# Altium PCB pcb_2023-05-29.pcbdoc
Units mm, origin at the board's own origin, x right, y up, seen from the top; angles counter-clockwise.
Board outline 86.78 x 96.39 mm, 2 copper layers (Top Layer, Bottom Layer); 4 components, 34 nets, 40 pads, 0 vias.
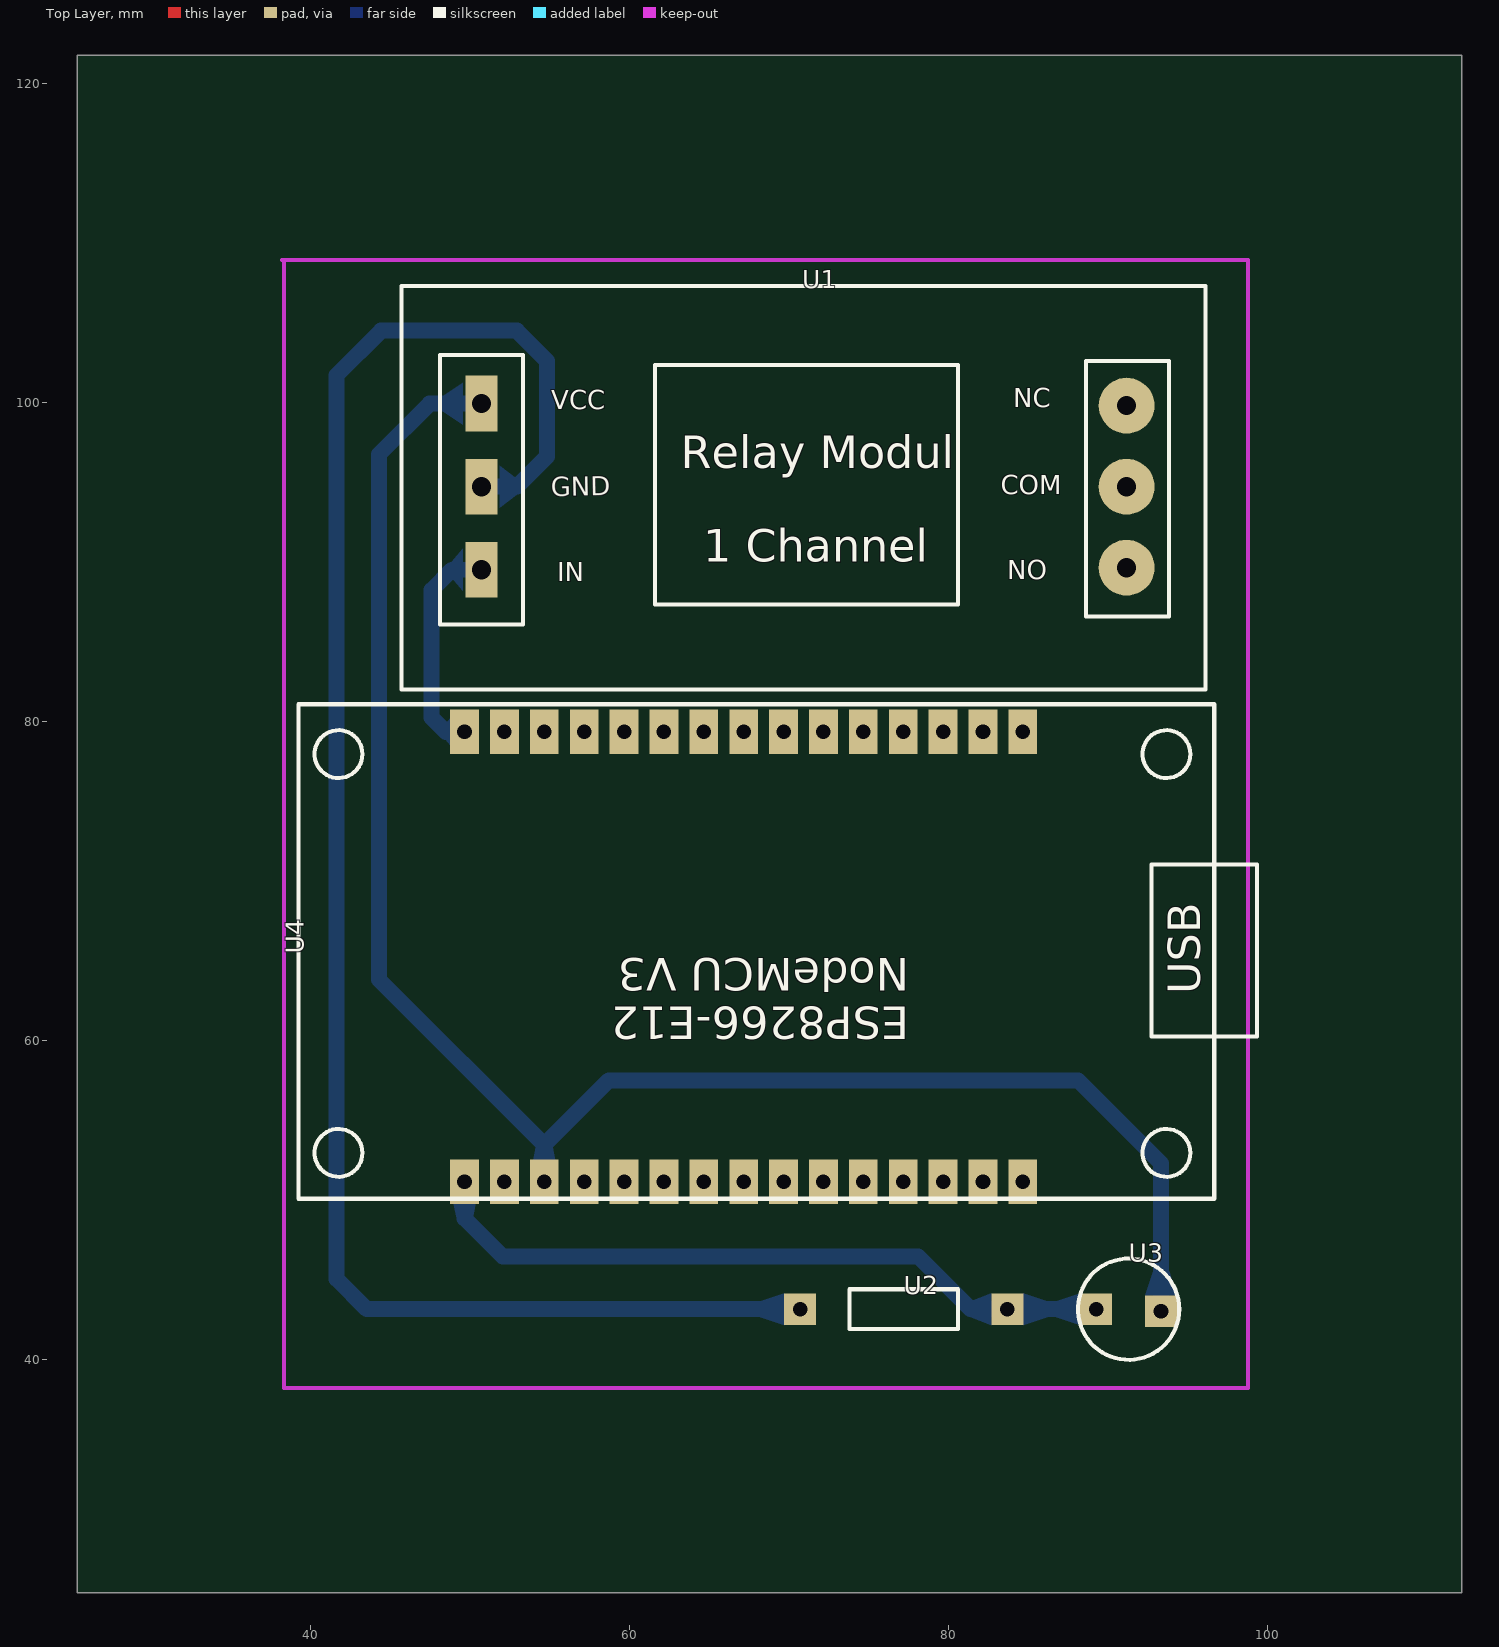
[diagram p0: Top Layer view]
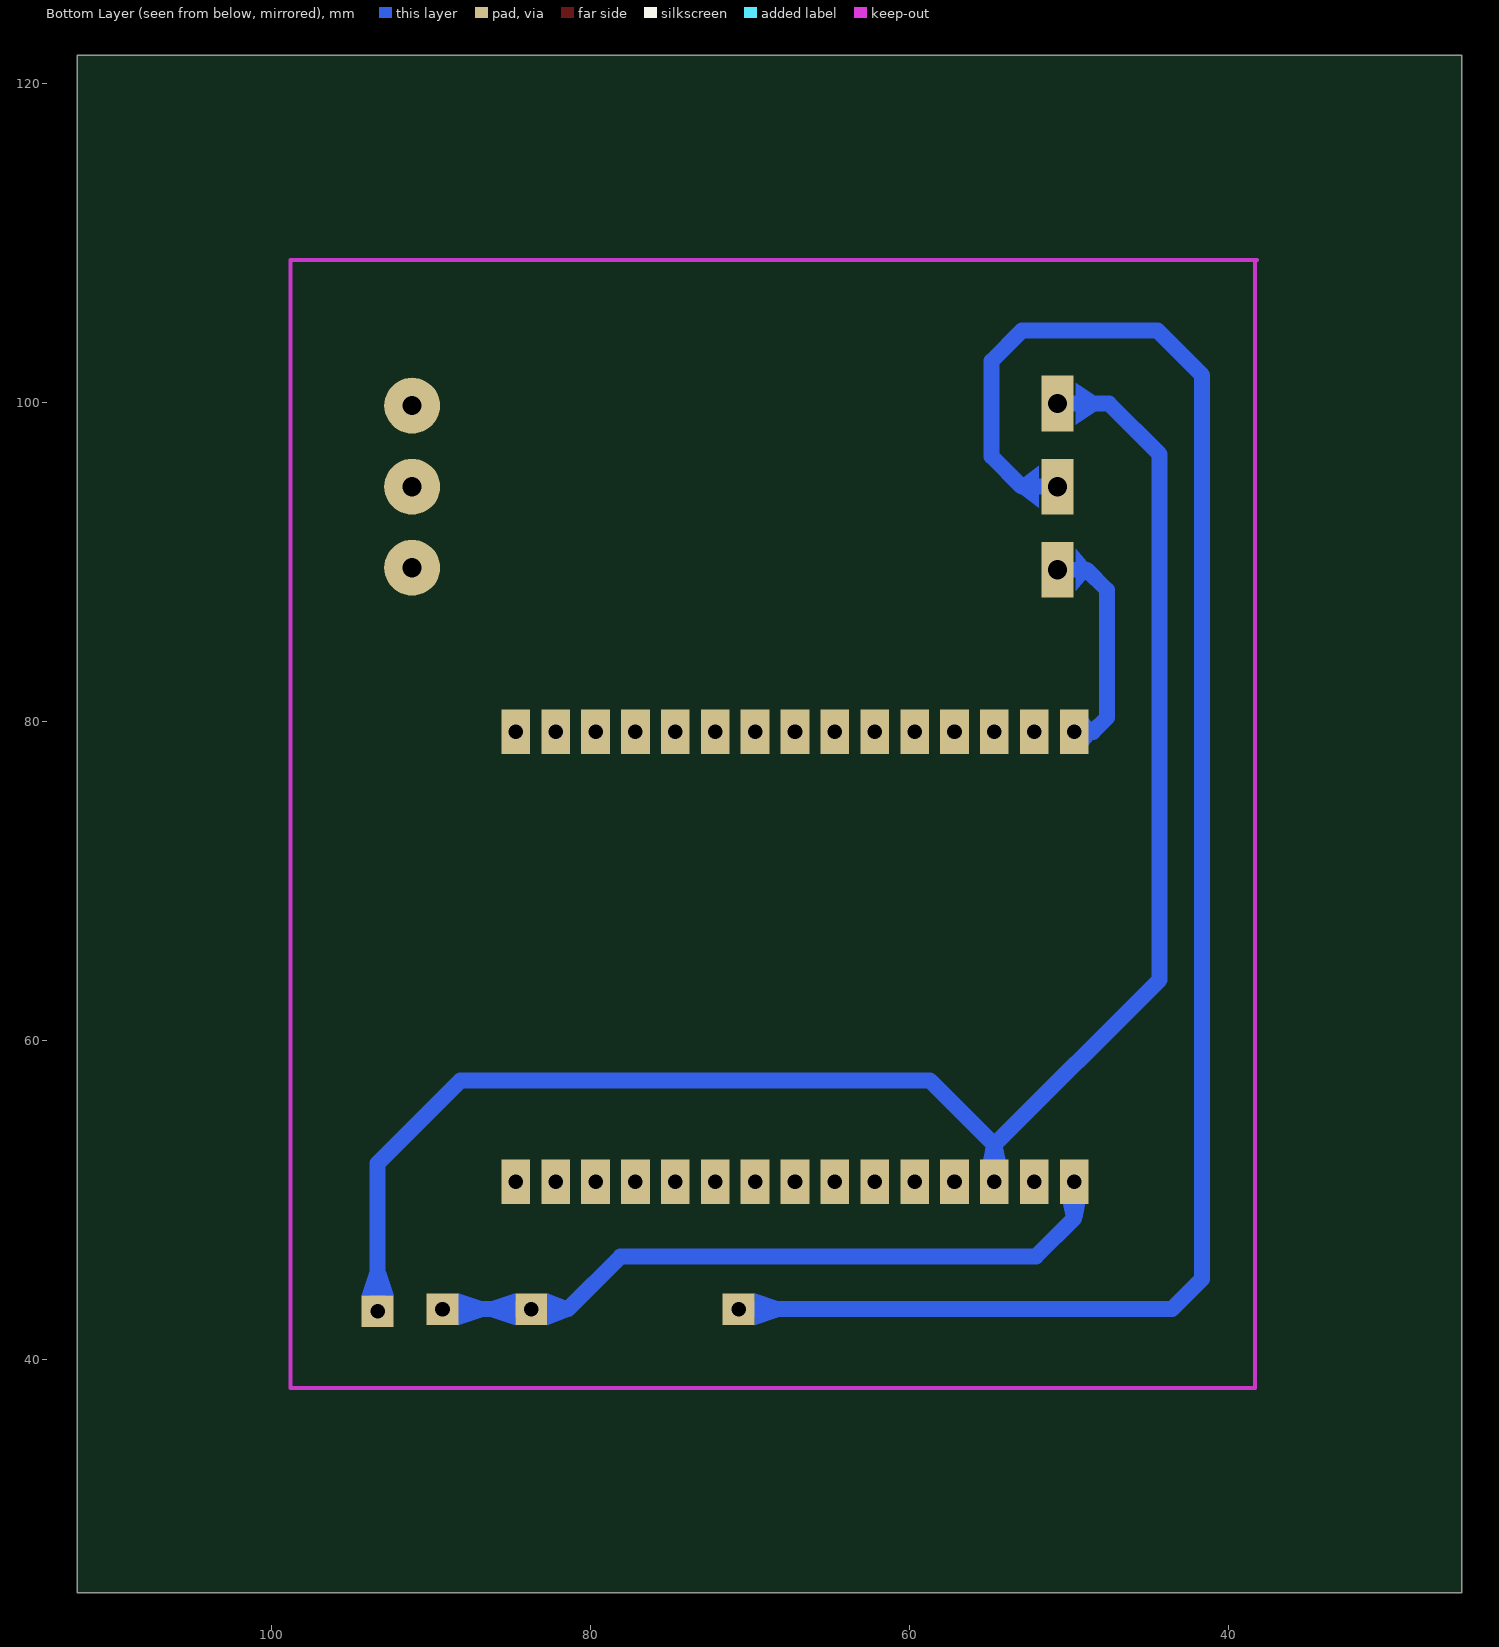
[diagram p1: Bottom Layer view, seen from below]

## Layer stack, top to bottom
Top Layer: signal copper (thickness not stored)
Dielectric: dielectric 0.32, FR-4, Dk 4.8
Bottom Layer: signal copper (thickness not stored)

## Board outline
112.181,25.4 25.4,25.4 25.4,121.793 112.181,121.793

## Components (designator, comment, footprint, x,y, rotation, side; value= is the part's Value field where it differs from the comment)
U1 "Relay Module 1 Channel" "RELAY MODULE HW-279 2 RELAYS" 70.866,94.869 r0 top
U2 "10KRESISTOR" 10KRESISTOR 77.216,43.18 r0 top
U3 "LDR" LDR 89.281,43.18 r0 top
U4 "ESP8266-E12 NODEMCU V3" ESP8266-E12-NODEMCU-V3 67.183,65.278 r90 top

## Footprints (in the part's own frame and the unit in brackets; to place one, negate y for a bottom-side part, rotate by r counter-clockwise, add the part's x,y. Pads: shape width x height; smd on the part's side, far side on the other; paste and mask are expansions set on the pad)
10KRESISTOR [mm]
  rect 2x2 hole 0.914: 1(6.5,0) 2(-6.5,0)
  silkscreen extent -3.4,-1.25 3.4,1.25
ESP8266-E12-NODEMCU-V3 [mm]
  rect 2.8x1.8 hole 0.914: 1(-14.1,17.5) 2(-14.1,15) 3(-14.1,12.5) 4(-14.1,10) 5(-14.1,7.5) 6(-14.1,5) 7(-14.1,2.5) 8(-14.1,0) 9(-14.1,-2.5) 10(-14.1,-5) 11(-14.1,-7.5) 12(-14.1,-10) 13(-14.1,-12.5) 14(-14.1,-15) 15(-14.1,-17.5) 16(14.1,17.5) 17(14.1,15) 18(14.1,12.5) 19(14.1,10) 20(14.1,7.5) 21(14.1,5) 22(14.1,2.5) 23(14.1,0) 24(14.1,-2.5) 25(14.1,-5) 26(14.1,-7.5) 27(14.1,-10) 28(14.1,-12.5) 29(14.1,-15) 30(14.1,-17.5)
  silkscreen extent -15.17,-32.17 15.83,27.9
LDR [mm]
  rect 2x2 hole 0.914: 1(0,0) 2(4.064,-0.127)
  silkscreen extent -1.14,-3.17 5.21,3.17
"RELAY MODULE HW-279 2 RELAYS" [mm]
  rect 2x3.5 hole 1.2: 1(-20.13,-5.334) 2(-20.13,-0.127) 3(-20.13,5.08)
  round 3.5 hole 1.2: 4(20.32,-5.207) 5(20.32,-0.127) 6(20.32,4.953)
  silkscreen extent -25.15,-12.83 25.27,12.45

## Nets (pads, with @x,y where several pads share a name; then routed paths per layer and width w, separated by ;. In a path a pad name is that pad's centre, name@x,y a point inside that pad or via, vN(x,y) a via of type N, cw(c..) or ccw(c..) an arc to the next point about the centre after c; other vN are vias at no path point)
GND: U1.2 U2.2 | length 112.5
  Bottom Layer w1: U1.2 52.959,94.742 54.864,96.647 54.864,102.616 52.959,104.521 44.45,104.521 41.656,101.727 41.656,45.085 43.561,43.18 U2.2
U1_4: U1.4
U1_5: U1.5
U1_6: U1.6
U2_1: U2.1 U3.1 U4.1 | length 44.3
  Bottom Layer w1: U4.1 49.682,48.877 52.078,46.482 78.113,46.482 81.415,43.18 U2.1 U3.1
U3_2: U1.3 U3.2 U4.3 | length 109.4
  Bottom Layer w1: U1.3 47.498,99.949 44.323,96.774 44.323,63.84 54.684,53.48 ; U4.3 54.684,53.48 ; U3.2 93.345,52.324 88.138,57.531 58.735,57.531 54.684,53.48
U4_2: U4.2
U4_4: U4.4
U4_5: U4.5
U4_6: U4.6
U4_7: U4.7
U4_8: U4.8
U4_9: U4.9
U4_10: U4.10
U4_11: U4.11
U4_12: U4.12
U4_13: U4.13
U4_14: U4.14
U4_15: U4.15
U4_16: U1.1 U4.16 | length 14.1
  Bottom Layer w1: U4.16 48.511,79.378 47.625,80.264 47.625,88.265 48.895,89.535 U1.1
U4_17: U4.17
U4_18: U4.18
U4_19: U4.19
U4_20: U4.20
U4_21: U4.21
U4_22: U4.22
U4_23: U4.23
U4_24: U4.24
U4_25: U4.25
U4_26: U4.26
U4_27: U4.27
U4_28: U4.28
U4_29: U4.29
U4_30: U4.30

## Other copper
Bottom Layer:
  region net U3_2: 49.579,98.637 49.579,101.261 48.354,100.449 48.354,99.449
  region net GND: 51.894,93.43 51.894,96.054 52.959,95.242 52.959,94.242
  region net U4_16: 49.579,88.223 49.579,90.847 48.895,90.035 48.895,89.035
  region net GND: 69.716,42.18 69.716,44.18 68.216,43.68 68.216,42.68
  region net U2_1: 82.716,42.18 82.716,44.18 81.416,43.68 81.416,42.68
  region net U2_1: 84.716,44.18 84.716,42.18 86.216,42.68 86.216,43.68
  region net U2_1: 88.281,42.18 88.281,44.18 86.781,43.68 86.781,42.68
  region net U3_2: 92.345,44.053 94.345,44.053 93.845,45.553 92.845,45.553
  region net U2_1: 50.445,50.178 48.921,50.178 49.183,48.877 50.183,48.877
  region net U3_2: 53.921,52.178 55.445,52.178 55.183,53.48 54.183,53.48
  region net U4_16: 48.921,78.378 48.921,80.378 48.512,79.878 48.512,78.878

## Silkscreen, mask and mechanical layers (free items; w line width, h text height)
Document:
  lines w0.003: 68.79,73.596 68.791,73.597

## Text inside footprints (layer, text, board x,y; h text height)
U1: Top Overlay "Relay Modul" at 63.246,95.885 h2.03; Top Overlay "1 Channel" at 64.643,90.043 h2.03; Top Overlay "VCC" at 55.118,99.187 h2.03; Top Overlay "GND" at 55.118,93.726 h2.03 r1; Top Overlay "IN" at 55.499,88.392 h2.03; Top Overlay "NC" at 84.074,99.314 h2.03; Top Overlay "COM" at 83.312,93.853 h2.03; Top Overlay "NO" at 83.693,88.519 h2.03
U4: Top Overlay "ESP8266-E12 / NodeMCU V3" at 77.569,65.182 h2.03 r180; Top Overlay "USB" at 95.798,62.932 h2.03 r90